# Altium PCB ArduinoRev2.PcbDoc
Units mm, origin at the board's own origin, x right, y up, seen from the top; angles counter-clockwise.
Board outline 57 x 56 mm, 2 copper layers (Top Layer, Bottom Layer); 35 components, 27 nets, 139 pads, 20 vias.
Unrouted connection lines stored in the file: 32.
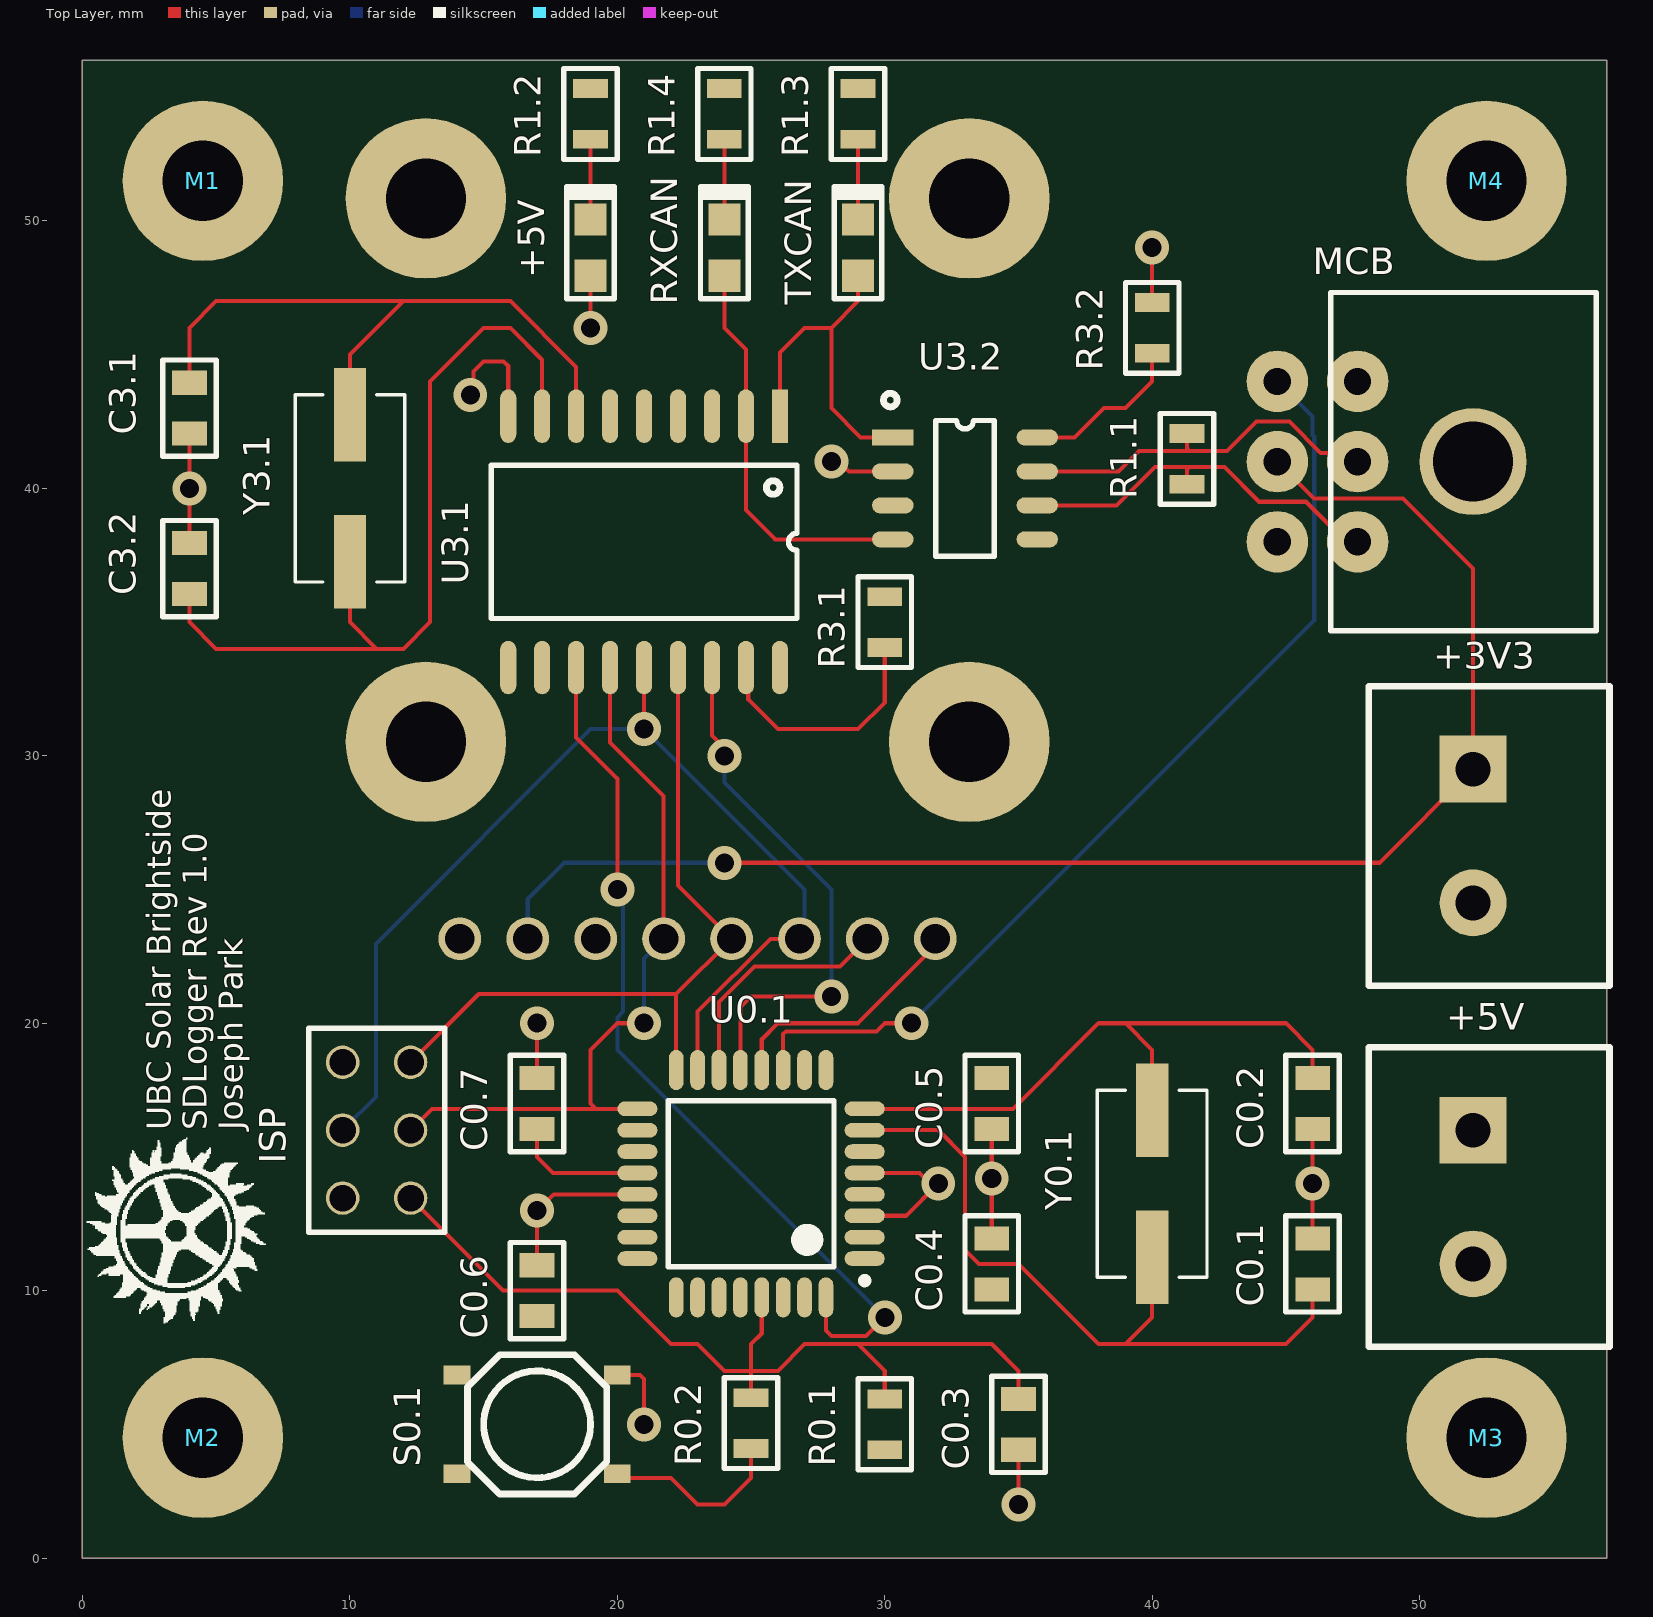
[diagram p0: Top Layer view]
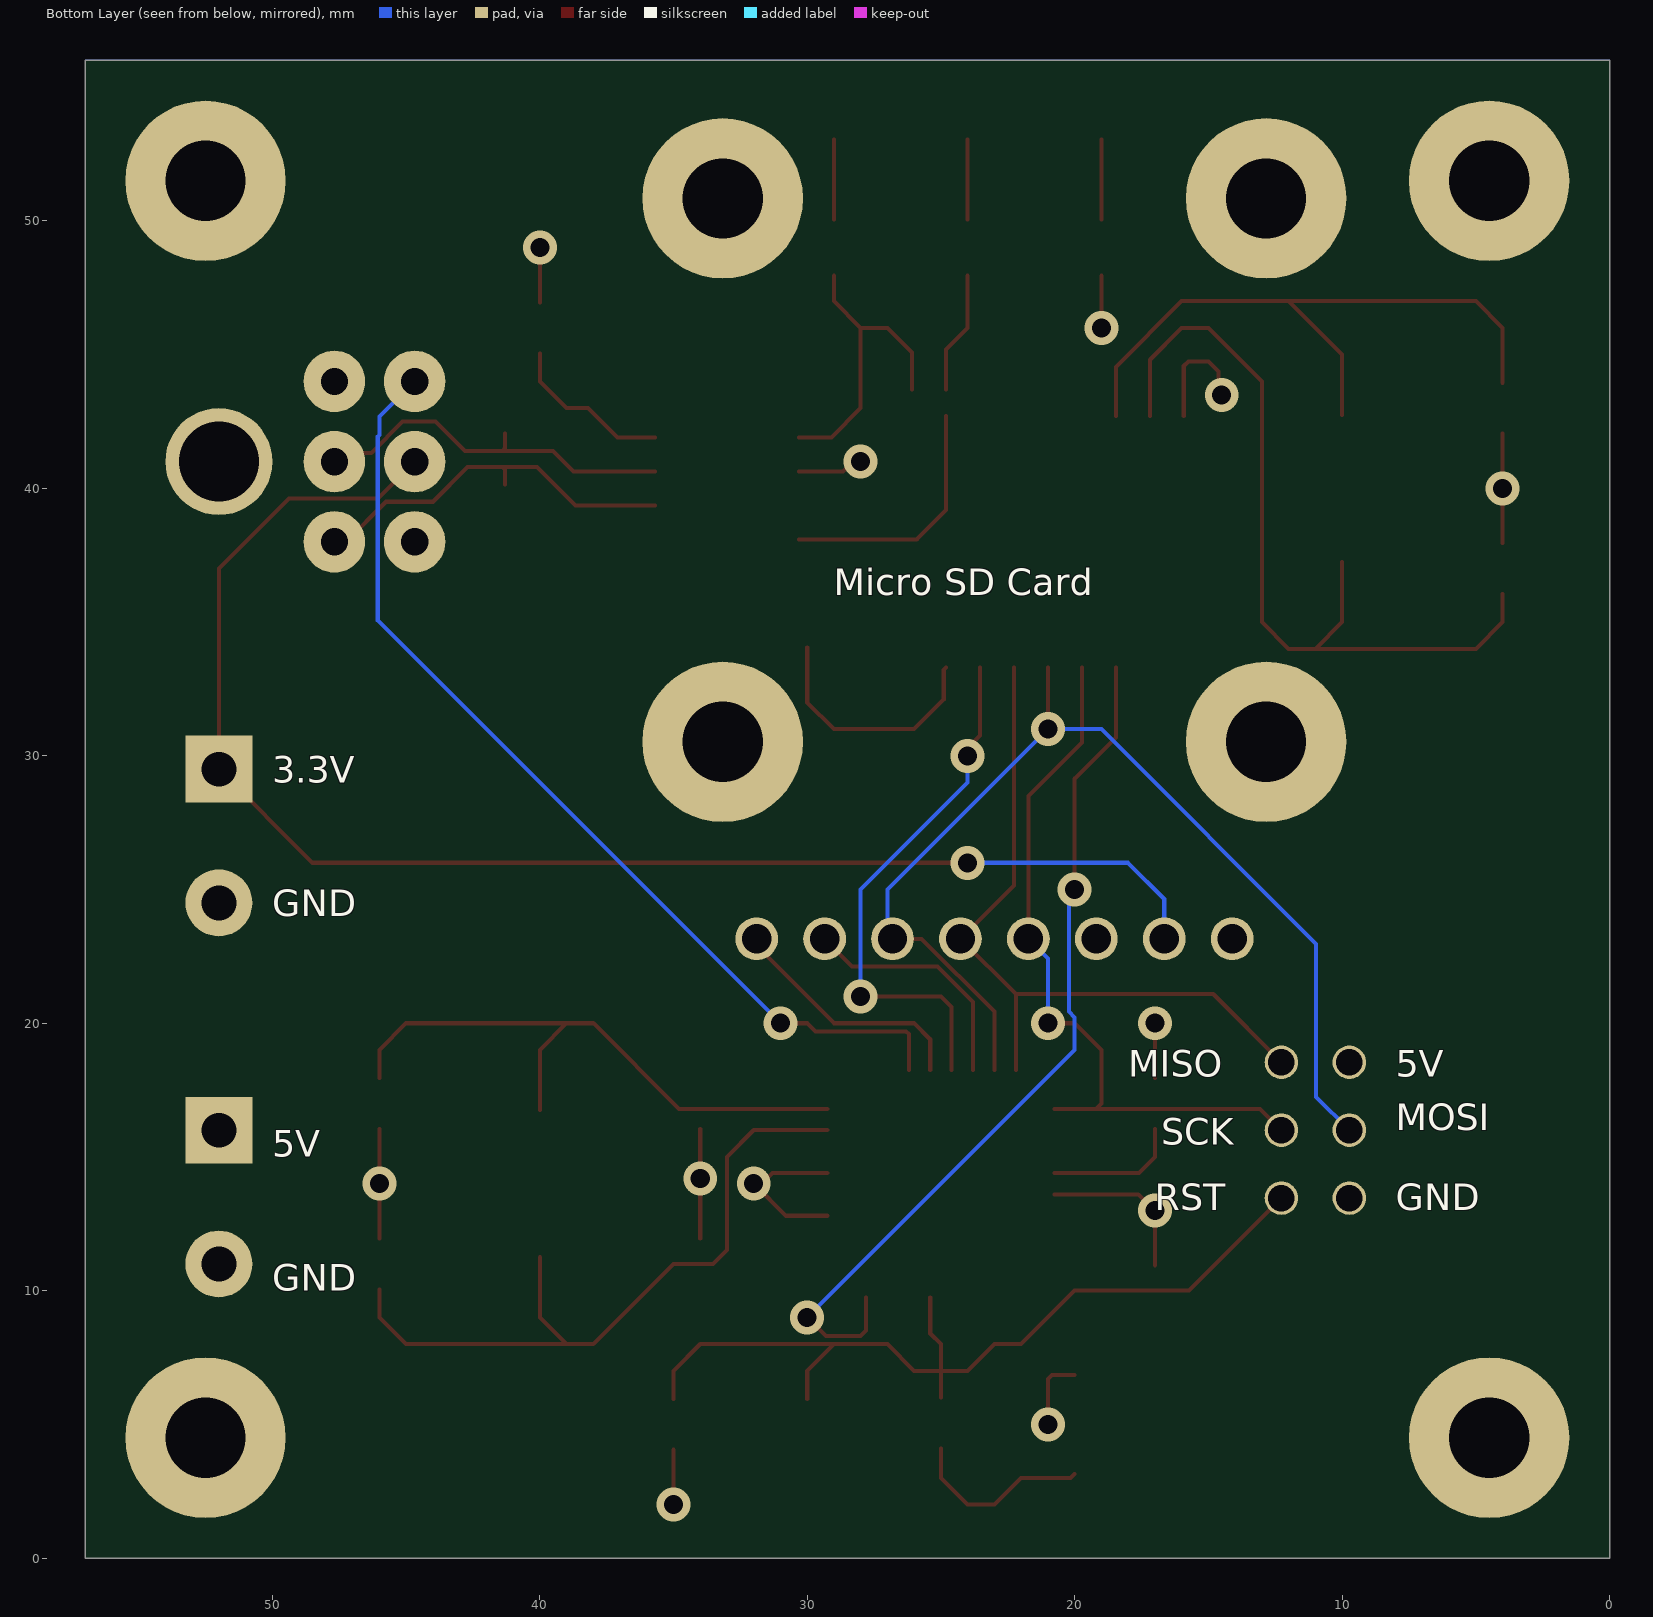
[diagram p1: Bottom Layer view, seen from below]
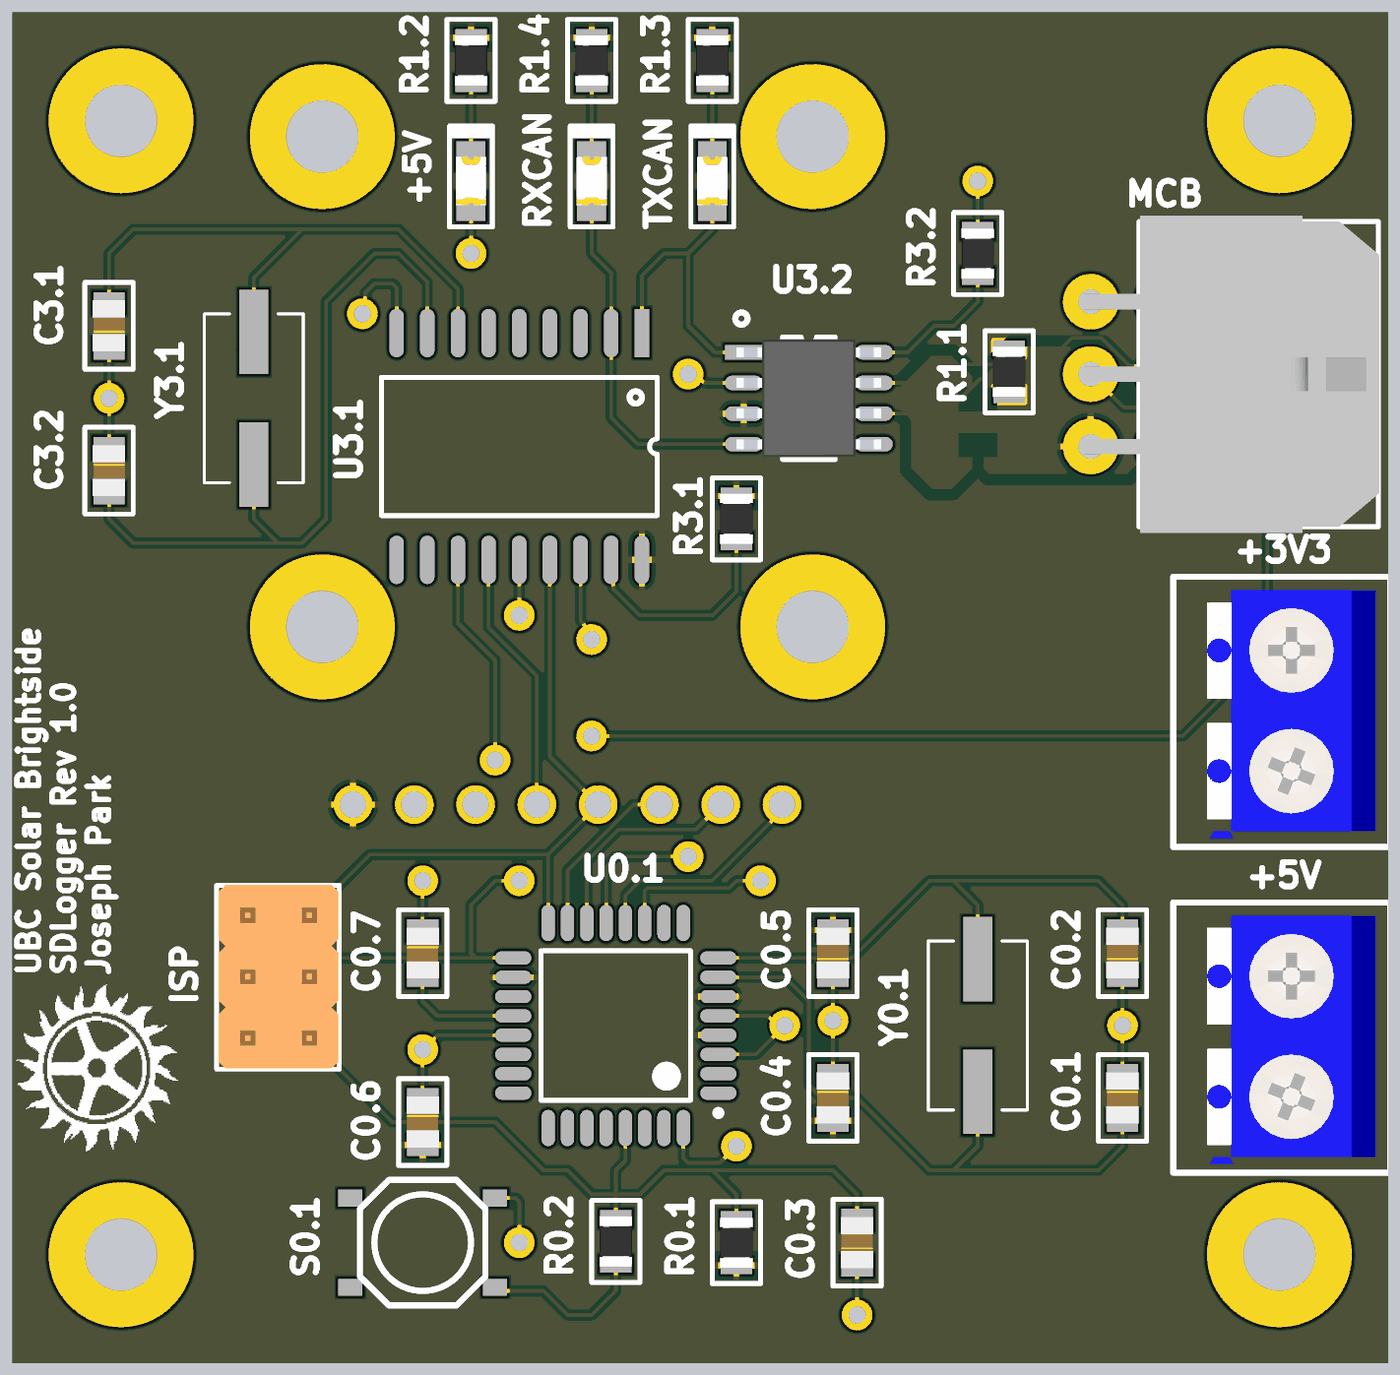
[diagram p2: 3D render of the assembled board from above, using the file's embedded part models]

## Layer stack, top to bottom
Top Solder: solder mask 0.0102, Solder Resist, Dk 3.5
Top Layer: signal copper 0.0356
Dielectric 1: dielectric 0.32, FR-4, Dk 4.8
Bottom Layer: signal copper 0.0356
Bottom Solder: solder mask 0.0102, Solder Resist, Dk 3.5

## Board outline
0,0 57,0 57,56 0,56

## Design rules (kind name [scope] priority, off if disabled: settings)
Clearance [All] p1: gap=0.152 ignorepadtopadclearanceinfootprint=FALSE
HoleSize [All] p1: absolutevalues=TRUE maxlimit=100 minlimit=0.4 maxpercent=80.000 minpercent=20.000
MinimumSolderMaskSliver [All] p1: minsoldermaskwidth=0
PolygonConnect [All] p1: connectstyle=Relief reliefconductorwidth=0.254 reliefentries=4 polygonreliefangle="90 Angle" airgapwidth=0.254
RoutingVias [All] p1: holewidth=0.4 width=0.8 viastyle="Through Hole" minholewidth=0.4 minwidth=0.6 maxholewidth=100 maxwidth=100
SilkToSolderMaskClearance [IsPad] p1: minsilkscreentomaskgap=0 clearancetoexposedcopper=TRUE
SolderMaskExpansion [All] p1: expansion=0.102
Width [All] p1: maxlimit=100 minlimit=0.152 preferedwidth=0.152
27 further rules are at their usual default settings.

## Classes and differential pairs
component class ArduinoRev2: +3V3 +5V C0.1 C0.2 C0.3 C0.4 C0.5 C0.6 C0.7 C3.1 C3.2 ISP M1 M2 M3 M4 MCB "Micro SD Card" R0.1 R0.2 R1.1 R1.2 R1.3 R1.4 R3.1 R3.2 U0.1 U3.1 U3.2 Y0.1 Y3.1

## Components (designator, comment, footprint, x,y, rotation, side; value= is the part's Value field where it differs from the comment)
+3V3 "Scru" "5mm 2POS Screw terminal" 52,27 r270 top (schematic designator J1.2)
+5V "Scru" "5mm 2POS Screw terminal" 52,13.5 r270 top (schematic designator J1.1)
+5V "Red LED" L0805 19,49 r270 top (schematic designator D1.1)
C0.1 "22pF" C0805 46,11 r270 top
C0.2 "22pF" C0805 46,17 r90 top
C0.3 "0.1uF" C0805 35,5 r90 top
C0.4 "0.1uF" C0805 34,11 r270 top
C0.5 "0.1uF" C0805 34,17 r90 top
C0.6 "0.1uF" C0805 17,10 r270 top
C0.7 "0.1uF" C0805 17,17 r270 top
C3.1 "20pF" C0805 4,43 r90 top
C3.2 "20pF" C0805 4,37 r270 top
ISP "HDR" 961206-6404-AR 11,16 r270 top (schematic designator J0.1)
M1 "3mm Mounting Hole" "3mm Mounting Hole"#1 4,53 r0 top
M2 "3mm Mounting Hole" "3mm Mounting Hole"#2 5,5 r0 top
M3 "3mm Mounting Hole" "3mm Mounting Hole"#3 53,4 r0 top
M4 "3mm Mounting Hole" "3mm Mounting Hole"#4 50,53 r0 top
MCB "43045-0600" "Micro-Fit 3.0 6pos" 47.68,41 r90 top (schematic designator J1.3)
"Micro SD Card" "microSD_Card_breakout_board" "Adafruit microSD_breakoutboard" 23,37 r180 bottom (schematic designator U2.1)
R0.1 "4.7K ohm" R0805 30,5 r270 top
R0.2 "330" R0805 25,5.05 r90 top
R1.1 "120 ohm" R0805 41.3,41.1 r90 top
R1.2 "1K" R0805 19,54 r90 top
R1.3 "1K" R0805 29,54 r90 top
R1.4 "1K" R0805 24,54 r90 top
R3.1 "10K" R0805 30,35 r90 top
R3.2 "1K" R0805 40,46 r90 top
RXCAN "Green LED" L0805 24,49 r270 top (schematic designator D1.3)
S0.1 "SPST-NO" "PTS526 SM15 SMTR2 LFS" 17,5 r180 top
TXCAN "Green LED" L0805 29,49 r270 top (schematic designator D1.2)
U0.1 "ATMEGA328P-AU" TQFP80P900X900X120-32N 25,14 r180 top
U3.1 "MCP2515" SOP18 21,38 r270 top
U3.2 "MCP2551" SOP8 33,40 r0 top
Y0.1 "16MHz" ECS-160-20-3X-TR 40,14 r270 top
Y3.1 "16MHz" ECS-160-20-3X-TR 10,40 r90 top

## Footprints (in the part's own frame and the unit in brackets; to place one, negate y for a bottom-side part, rotate by r counter-clockwise, add the part's x,y. Pads: shape width x height; smd on the part's side, far side on the other; paste and mask are expansions set on the pad)
"3mm Mounting Hole"#1 [mm]
  round 6 hole 3: 1(0.5,-1.5)
"3mm Mounting Hole"#2 [mm]
  round 6 hole 3: 1(-0.5,-0.5)
"3mm Mounting Hole"#3 [mm]
  round 6 hole 3: 1(-0.5,0.5)
"3mm Mounting Hole"#4 [mm]
  round 6 hole 3: 1(2.5,-1.5)
"5mm 2POS Screw terminal" [mm]
  rect 2.5x2.5 hole 1.3: 1(-2.5,0)
  round 2.5 hole 1.3: 2(2.5,0)
  silkscreen extent -5.6,-3.9 5.6,5.1, body extent -5.04,-3.1 5.24,4.5, height 10.01
961206-6404-AR [mm] "CONN HEADER VERT 6POS 2.54MM"
  round 1.25 hole 1: 1(-2.54,1.27) 2(0,1.27) 3(2.54,1.27) 4(-2.54,-1.27) 5(0,-1.27) 6(2.54,-1.27)
  silkscreen extent -3.81,-2.54 3.81,2.54, body extent -3.83,-2.47 3.79,2.53, height 7.51
"Adafruit microSD_breakoutboard" [mm]
  round 1.6 hole 1.1 mask+0.102: 1(8.89,-13.843) 2(6.35,-13.843) 3(3.81,-13.843) 4(1.27,-13.843) 5(-1.27,-13.843) 6(-3.81,-13.843) 7(-6.35,-13.843) 8(-8.89,-13.843)
  round 6 hole 3 unplated mask+0.102: ""(-10.16,-6.477) ""(-10.16,13.843) ""(10.16,-6.477) ""(10.16,13.843)
C0805 [mm]
  rect 0.9x1.3 smd: 1(-0.95,0) 2(0.95,0)
  silkscreen extent -1.8,-1 1.8,1, body extent -1.05,-0.67 1.05,0.67, height 0.94
ECS-160-20-3X-TR [mm]
  rect 3.5x1.2 smd: 1(-2.75,0) 2(2.75,0)
  silkscreen extent -3.5,-2.05 3.5,2.05, body extent -0.22,0.29 -0.22,0.29, height 0.25
L0805 [mm]
  rect 1.2x1.2 smd: 1(-1.05,0) 2(1.05,0)
  silkscreen extent -2.29,-0.89 1.91,0.89, body extent -1,-0.62 1,0.63, height 0.82
"Micro-Fit 3.0 6pos" [mm]
  round 2.3 hole 1.02: 1(3,0) 2(0,0) 3(-3,0) 4(3,3) 5(0,3) 6(-3,3)
  round 4 hole 3: ""(0,-4.32)
  silkscreen extent -6.32,-8.92 6.32,1, body extent -6.57,-8.95 6.58,3.29, height 8.78
"PTS526 SM15 SMTR2 LFS" [mm]
  rect 1x0.7 smd: 1(-3,1.85) 2(3,1.85) 3(-3,-1.85) 4(3,-1.85)
  silkscreen extent -2.6,-2.6 2.6,2.6
R0805 [mm]
  rect 0.7x1.3 smd: 1(-0.95,0) 2(0.95,0)
  silkscreen extent -1.7,-1 1.7,1, body extent -1.05,-0.67 1.05,0.68, height 0.6
SOP8 [mm]
  rect 1.55x0.6 smd: 1(-2.7,1.905)
  oval 1.55x0.6 smd: 2(-2.7,0.635) 3(-2.7,-0.635) 4(-2.7,-1.905) 5(2.7,-1.905) 6(2.7,-0.635) 7(2.7,0.635) 8(2.7,1.905)
  silkscreen extent -3.05,-2.54 1.09,3.56, body extent -3,-2.45 3,2.45, height 1.75
SOP18 [mm]
  rect 2x0.6 smd: 1(-4.7,5.08)
  oval 2x0.6 smd: 2(-4.7,3.81) 3(-4.7,2.54) 4(-4.7,1.27) 5(-4.7,0) 6(-4.7,-1.27) 7(-4.7,-2.54) 8(-4.7,-3.81) 9(-4.7,-5.08) 10(4.7,-5.08) 11(4.7,-3.81) 12(4.7,-2.54) 13(4.7,-1.27) 14(4.7,0) 15(4.7,1.27) 16(4.7,2.54) 17(4.7,3.81) 18(4.7,5.08)
  silkscreen extent -2.86,-5.72 2.87,5.72, body extent -3.75,-5.8 3.75,5.8, height 2.65
TQFP80P900X900X120-32N [mm] "TQFP, 32-Leads, Body 7.00x7.00mm, Pitch 0.80mm, IPC Medium Density"
  oval 1.5x0.55 smd: 1(-4.25,2.8) 2(-4.25,2) 3(-4.25,1.2) 4(-4.25,0.4) 5(-4.25,-0.4) 6(-4.25,-1.2) 7(-4.25,-2) 8(-4.25,-2.8) 17(4.25,-2.8) 18(4.25,-2) 19(4.25,-1.2) 20(4.25,-0.4) 21(4.25,0.4) 22(4.25,1.2) 23(4.25,2) 24(4.25,2.8)
  oval 0.55x1.5 smd: 9(-2.8,-4.25) 10(-2,-4.25) 11(-1.2,-4.25) 12(-0.4,-4.25) 13(0.4,-4.25) 14(1.2,-4.25) 15(2,-4.25) 16(2.8,-4.25) 25(2.8,4.25) 26(2,4.25) 27(1.2,4.25) 28(0.4,4.25) 29(-0.4,4.25) 30(-1.2,4.25) 31(-2,4.25) 32(-2.8,4.25)
  silkscreen extent -4.38,-3.1 3.1,3.75, body extent -3.5,-3.5 3.5,3.5, height 1.2

## Part data
+3V3 +5V: library part "5mm 2POS Screw terminal"
+5V: library part SML-LXT0805SRW-TR, "LED RED DIFFUSED 0805 SMD", Case/Package=0805, Case Code (Metric)=2012, Color=Red, Forward Current=20mA, Forward Voltage=1.8V, Lens Color=White, Manufacturer=Lumex, Max Operating Temperature=80°C, Min Operating Temperature=-25°C, Package Quantity=1, Power Rating=80mW, Supplier Part Number 1=67-1555-1-ND, Case Code (Imperial)=0805, Category=Optoelectronics, ComponentLink1Description=https://datasheet.ciiva.com/15967/smllxt0805srwtr-15967412.pdf?src-supplier=Onlinecomponents.com, ComponentLink1URL=https://datasheet.ciiva.com/15967/smllxt0805srwtr-15967412.pdf?src-supplier=Onlinecomponents.com, ComponentLink2Description=https://datasheet.ciiva.com/4688/sml-lxt0805srw-tr-114457-4688733.pdf?src-supplier=Mouser, ComponentLink2URL=https://datasheet.ciiva.com/4688/sml-lxt0805srw-tr-114457-4688733.pdf?src-supplier=Mouser, ComponentLink3Description=https://datasheet.ciiva.com/2110/sml-lxt0805srw-tr-2110039.pdf?src-supplier=Digi-Key, ComponentLink3URL=https://datasheet.ciiva.com/2110/sml-lxt0805srw-tr-2110039.pdf?src-supplier=Digi-Key, ComponentLink4Description=https://datasheet.ciiva.com/2110/sml-lxt0805srw-tr-2110040.pdf?src-supplier=Digi-Key, ComponentLink4URL=https://datasheet.ciiva.com/2110/sml-lxt0805srw-tr-2110040.pdf?src-supplier=Digi-Key, ComponentLink5Description=https://datasheet.ciiva.com/2110/sml-lxt0805srw-tr-2110041.pdf?src-supplier=Digi-Key, ComponentLink5URL=https://datasheet.ciiva.com/2110/sml-lxt0805srw-tr-2110041.pdf?src-supplier=Digi-Key, ComponentLink6Description=https://datasheet.ciiva.com/16376/sml-lxt0805srw-tr-16376845.pdf?src-supplier=Future+Electronics, ComponentLink6URL=https://datasheet.ciiva.com/16376/sml-lxt0805srw-tr-16376845.pdf?src-supplier=Future+Electronics, Height=0.8mm, Illumination Color=Red, Lead Free="Lead Free", Length=2mm, Lens Style=Diffused, Lens Transparency=Diffused, Luminous Intensity=21mcd, Manufacturer Part Number=SML-LXT0805SRW-TR, Mount="Surface Mount", Number of LEDs=1, Number of Pins=2, Packaging="Tape and Reel", Pricing 1="1 = 0.51000, 10 = 0.36600, 25 = 0.28080, 100 = 0.18320, 250 = 0.13432, 500 = 0.11396, 1000 = 0.09361 (USD)", REACH SVHC="No SVHC", RoHS=Yes, Stock 1=60948, Supplier 1=Digi-Key, Test Current=20mA, Viewing Angle=140°, Wavelength=660nm, Width=1.25mm
C0.1 C0.2: library part CC0805JRNPO9BN220, "CAP CER 22PF 50V C0G/NPO 0805"
C0.3 C0.4 C0.5 C0.6 C0.7: library part CL21B104KBCWPNC, "CAP CER 0.1UF 50V X7R 0805", Capacitance=100nF, Case/Package=0805, Case Code (Metric)=2012, Manufacturer=Samsung, Max Operating Temperature=125°C, Min Operating Temperature=-55°C, Ratings=AEC-Q200, Supplier Part Number 1=1276-6557-1-ND, Tolerance=10%, Voltage Rating=50V, Case Code (Imperial)=0805, Category=Capacitors, Features="Soft Termination", Length=0.079inch, Manufacturer Part Number=CL21B104KBCWPNC, Mount="Surface Mount", Packaging="Tape and Reel", Pricing 1="1 = 0.10000, 10 = 0.06700, 100 = 0.02990, 500 = 0.02138, 1000 = 0.01680 (USD)", RoHS=Yes, Stock 1=6545, Supplier 1=Digi-Key, Thickness=0.053inch, Width=0.049inch
C3.1 C3.2: library part C0805C200J5GACTU, "CAP CER 20PF 50V C0G/NP0 0805", Capacitance=10nF, Case/Package=0805, Case Code (Metric)=2012, Dielectric=X7R, Manufacturer=Samsung, Manufacturer Part Number=CL21B103KBANNNC, Max Operating Temperature=125°C, Min Operating Temperature=-55°C, Supplier Part Number 1=399-8033-1-ND, Tolerance=10%, Voltage=50V, Case Code (Imperial)=0805, Category=Capacitors, ComponentLink1Description=https://www.digikey.com/product-detail/en/kemet/C0805C200J5GACTU/399-8033-1-ND/3471756, ComponentLink1URL=https://www.digikey.com/product-detail/en/kemet/C0805C200J5GACTU/399-8033-1-ND/3471756, Contact Plating=Tin, Depth=1.25mm, Height=0.65mm, Lead Free="Lead Free", Length=2mm, Material=Ceramic, Mount="Surface Mount", Packaging="Tape and Reel", Radiation Hardening=No, RoHS=Yes, Supplier 1=Digi-Key, Thickness=0.03inch, Voltage Rating=50V, Voltage Rating (DC)=50V, Width=0.049inch
ISP: library part 961206-6404-AR, "CONN HEADER VERT 6POS 2.54MM", ComponentLink1Description=datasheet, ComponentLink1URL=https://media.digikey.com/pdf/Data%20Sheets/3M%20PDFs/961_2.54mm_StraightSolderTail_DS.pdf, ComponentLink2Description=digikey, ComponentLink2URL=https://www.digikey.com/product-detail/en/3m/961206-6404-AR/3M9466-06-ND/7105229
MCB: "Micro-fit 3.0 6pos right-angle", Case/Package=0612, Color=Black, Contact Resistance=10mR, Current Rating=5A, Flammability Rating="UL94 V-0", Manufacturer=Molex, Manufacturer Part Number=43045-0612, Max Operating Temperature=105°C, Max Voltage Rating (DC)=250.25kV, Min Operating Temperature=-40°C, Package Quantity=1728, Supplier Part Number 1=WM1815-ND, Voltage Rating=250V, Approvals=UL,CSA,TUV, Category="Headers and Wire Housings", ComponentLink1Description=https://datasheet.ciiva.com/30194/128550430450612-pcb-headers-30194512.pdf?src-supplier=Onlinecomponents.com, ComponentLink1URL=https://datasheet.ciiva.com/30194/128550430450612-pcb-headers-30194512.pdf?src-supplier=Onlinecomponents.com, ComponentLink2Description=https://datasheet.ciiva.com/5159/0430450612-pcb-headers-142990-5159553.pdf?src-supplier=Mouser, ComponentLink2URL=https://datasheet.ciiva.com/5159/0430450612-pcb-headers-142990-5159553.pdf?src-supplier=Mouser, ComponentLink3Description=https://datasheet.ciiva.com/11748/0900766b800bd7d2-11748707.pdf?src-supplier=RSComponents, ComponentLink3URL=https://datasheet.ciiva.com/11748/0900766b800bd7d2-11748707.pdf?src-supplier=RSComponents, ComponentLink4Description=https://datasheet.ciiva.com/19462/883464-19462371.pdf?src-supplier=Jameco, ComponentLink4URL=https://datasheet.ciiva.com/19462/883464-19462371.pdf?src-supplier=Jameco, ComponentLink5Description=https://datasheet.ciiva.com/16658/0430450612-pcb-headers-16658411.pdf?src-supplier=Avnet+Europe, ComponentLink5URL=https://datasheet.ciiva.com/16658/0430450612-pcb-headers-16658411.pdf?src-supplier=Avnet+Europe, ComponentLink6Description=https://datasheet.ciiva.com/20209/22-3730e-20209515.pdf?src-supplier=Rapid+Electronics, ComponentLink6URL=https://datasheet.ciiva.com/20209/22-3730e-20209515.pdf?src-supplier=Rapid+Electronics, ComponentLink7Description=https://datasheet.ciiva.com/9468/0430450612-pcb-headers-9468492.pdf?src-supplier=Avnet, ComponentLink7URL=https://datasheet.ciiva.com/9468/0430450612-pcb-headers-9468492.pdf?src-supplier=Avnet, Contact Material=Brass,Tin, Contact Plating=Tin, Depth=8.77mm, Diameter=3mm, Gender=Male, Glow Wire Compliant=Compliant, Halogen Free="Low Halogen", Height=9.91mm, Housing Color=Black, Housing Material=Polymer, Lead Free="Lead Free", Length=13.15mm, Material=Thermoplastic, Max Current Rating=5A, Mount="Through Hole", Number of Circuits=6, Number of Contacts=6, Number of Ports=1, Number of Positions=6, Number of Rows=2, Number of Terminals=6, Orientation=Vertical, Packaging=Tray, Pitch=3mm, Radiation Hardening=No, REACH SVHC=Unknown, RoHS=Yes, Row Spacing=3mm, Stock 1=8230, Supplier 1=Digi-Key, Termination=Solder
R0.1: library part RC0805JR-074K7L, "RES SMD 4.7K OHM 5% 1/8W 0805", ComponentLink1Description=digikey, ComponentLink1URL=https://www.digikey.ca/en/products/detail/yageo/RC0805JR-074K7L/728327
R0.2: library part RC0805JR-074K7L_1, "RES SMD 330 OHM 5% 1/8W 0805", ComponentLink1Description=digikey, ComponentLink1URL=https://www.digikey.ca/en/products/detail/yageo/RC0805JR-07330RL/731258
R1.1: library part ERJ6ENV1200V, "RES SMD 120 OHM 1% 1/8W 0805", Supplier Part Number 1=P120CCT-ND, ComponentLink1Description=https://datasheet.ciiva.com/11821/0900766b80f80784-11821533.pdf?src-supplier=RSComponents, ComponentLink1URL=https://datasheet.ciiva.com/11821/0900766b80f80784-11821533.pdf?src-supplier=RSComponents, Supplier 1=Digi-Key
R1.2 R1.3 R1.4 R3.2: library part ERJ6ENF1001V, "RES SMD 1K OHM 1% 1/8W 0805", Case/Package=0805, Case Code (Metric)=2012, Manufacturer=Panasonic, Max Operating Temperature=155°C, Max Power Dissipation=125mW, Min Operating Temperature=-55°C, Package Quantity=1, Resistance=1kR, Supplier Part Number 1=P1.00KCCT-ND, Temperature Coefficient=100ppm/°C, Tolerance=1%, Voltage Rating=150V, Case Code (Imperial)=0805, Category=Resistors, ComponentLink1Description=https://datasheet.ciiva.com/34303/1988962-34303619.pdf?src-supplier=Jameco, ComponentLink1URL=https://datasheet.ciiva.com/34303/1988962-34303619.pdf?src-supplier=Jameco, ComponentLink2Description=https://datasheet.ciiva.com/11808/0900766b80f80784-11808500.pdf?src-supplier=RSComponents, ComponentLink2URL=https://datasheet.ciiva.com/11808/0900766b80f80784-11808500.pdf?src-supplier=RSComponents, ComponentLink3Description=https://datasheet.ciiva.com/28532/426256-28532134.pdf?src-supplier=Element14, ComponentLink3URL=https://datasheet.ciiva.com/28532/426256-28532134.pdf?src-supplier=Element14, ComponentLink4Description=https://datasheet.ciiva.com/30051/aoa0000ce2-30051974.pdf?src-supplier=Onlinecomponents.com, ComponentLink4URL=https://datasheet.ciiva.com/30051/aoa0000ce2-30051974.pdf?src-supplier=Onlinecomponents.com, ComponentLink5Description=https://datasheet.ciiva.com/16774/70260748-16774249.pdf?src-supplier=Allied+Electronics, ComponentLink5URL=https://datasheet.ciiva.com/16774/70260748-16774249.pdf?src-supplier=Allied+Electronics, ComponentLink6Description=https://datasheet.ciiva.com/46373/1678782-46373337.pdf?src-supplier=Element14, ComponentLink6URL=https://datasheet.ciiva.com/46373/1678782-46373337.pdf?src-supplier=Element14, ComponentLink7Description=https://datasheet.ciiva.com/46373/1678782-46373338.pdf?src-supplier=Element14, ComponentLink7URL=https://datasheet.ciiva.com/46373/1678782-46373338.pdf?src-supplier=Element14, ComponentLink8Description=https://datasheet.ciiva.com/48532/aoa0000ce2-48532156.pdf?src-supplier=Avnet, ComponentLink8URL=https://datasheet.ciiva.com/48532/aoa0000ce2-48532156.pdf?src-supplier=Avnet, ComponentLink9Description=https://datasheet.ciiva.com/7942/426256-7942429.pdf?src-supplier=Element14, ComponentLink9URL=https://datasheet.ciiva.com/7942/426256-7942429.pdf?src-supplier=Element14, ComponentLink10Description=https://datasheet.ciiva.com/16199/aoa0000ce2-16199262.pdf?src-supplier=Future+Electronics, ComponentLink10URL=https://datasheet.ciiva.com/16199/aoa0000ce2-16199262.pdf?src-supplier=Future+Electronics, ComponentLink11Description=https://datasheet.ciiva.com/9117/aoa0000ce2-9117391.pdf?src-supplier=Avnet, ComponentLink11URL=https://datasheet.ciiva.com/9117/aoa0000ce2-9117391.pdf?src-supplier=Avnet, ComponentLink12Description=https://datasheet.ciiva.com/16523/aoa0000ce2-16523855.pdf?src-supplier=Avnet+Asia, ComponentLink12URL=https://datasheet.ciiva.com/16523/aoa0000ce2-16523855.pdf?src-supplier=Avnet+Asia, Composition="Thick Film", Contact Plating=Tin, Depth=1.25mm, Features="Automotive AEC-Q200", Height=0.6mm, Lead Free="Lead Free", Length=2mm, Manufacturer Part Number=ERJ6ENF1001V, Military Standard=Not, Mount="Surface Mount", Number of Pins=2, Number of Terminations=2, Packaging="Tape and Reel", Power Rating=125mW, Pricing 1="1 = 0.100000, 10 = 0.081000, 100 = 0.031100, 1000 = 0.013670, 2500 = 0.011810 (USD)", Radiation Hardening=No, REACH SVHC="No SVHC", RoHS=Yes, Stock 1=946321, Supplier 1=Digi-Key, Termination=SMD/SMT, Voltage Rating (DC)=150V, Width=0.049inch
R3.1: library part ERJ6ENF1002V, "RES SMD 10K OHM 1% 1/8W 0805", Case/Package=0805, Manufacturer=Yageo, Manufacturer Part Number=ERJ-6ENF1002V, Max Operating Temperature=155°C, Min Operating Temperature=-55°C, Power Rating=125mW, Resistance=10000R, Supplier Part Number 1=P10.0KCCT-ND, Temperature Coefficient=100ppm/°C, Tolerance=1%, Voltage Rating (DC)=150V, Category=Resistors, ComponentLink1Description=https://datasheet.ciiva.com/27056/2078477-27056611.pdf?src-supplier=Jameco, ComponentLink1URL=https://datasheet.ciiva.com/27056/2078477-27056611.pdf?src-supplier=Jameco, Depth=1.25mm, Height=0.5mm, Lead Free="Lead Free", Length=2mm, Mount="Surface Mount", Number of Pins=2, Packaging="Tape and Reel", Pricing 1="1 = 0.100000, 10 = 0.081000, 100 = 0.031100, 1000 = 0.013670, 2500 = 0.011810 (USD)", REACH SVHC="No SVHC", RoHS=No, Stock 1=3342401, Supplier 1=Digi-Key, Width=1.25mm
RXCAN TXCAN: library part SML-LXT0805GW-TR, "LED GREEN DIFFUSED SMD", Case/Package=0805, Case Code (Metric)=2012, Color=Green, Forward Current=20mA, Forward Voltage=2V, Lens Color=White, Manufacturer=Lumex, Max Operating Temperature=85°C, Min Operating Temperature=-25°C, Package Quantity=1, Power Rating=50mW, Supplier Part Number 1=67-1553-1-ND, Approvals=UL, Case Code (Imperial)=0805, Category=Optoelectronics, ComponentLink1Description=https://datasheet.ciiva.com/2110/sml-lxt0805gw-tr-2110192.pdf?src-supplier=Digi-Key, ComponentLink1URL=https://datasheet.ciiva.com/2110/sml-lxt0805gw-tr-2110192.pdf?src-supplier=Digi-Key, ComponentLink2Description=https://datasheet.ciiva.com/4689/sml-lxt0805gw-tr-82662-4689266.pdf?src-supplier=Mouser, ComponentLink2URL=https://datasheet.ciiva.com/4689/sml-lxt0805gw-tr-82662-4689266.pdf?src-supplier=Mouser, ComponentLink3Description=https://datasheet.ciiva.com/30063/sml-lxt0805gw-tr-30063898.pdf?src-supplier=Onlinecomponents.com, ComponentLink3URL=https://datasheet.ciiva.com/30063/sml-lxt0805gw-tr-30063898.pdf?src-supplier=Onlinecomponents.com, ComponentLink4Description=https://datasheet.ciiva.com/2110/sml-lxt0805gw-tr-2110193.pdf?src-supplier=Digi-Key, ComponentLink4URL=https://datasheet.ciiva.com/2110/sml-lxt0805gw-tr-2110193.pdf?src-supplier=Digi-Key, ComponentLink5Description=https://datasheet.ciiva.com/2110/sml-lxt0805gw-tr-2110194.pdf?src-supplier=Digi-Key, ComponentLink5URL=https://datasheet.ciiva.com/2110/sml-lxt0805gw-tr-2110194.pdf?src-supplier=Digi-Key, ComponentLink6Description=https://datasheet.ciiva.com/16383/sml-lxt0805gw-tr-16383723.pdf?src-supplier=Future+Electronics, ComponentLink6URL=https://datasheet.ciiva.com/16383/sml-lxt0805gw-tr-16383723.pdf?src-supplier=Future+Electronics, Dominant Wavelength=568nm, Height=0.8mm, Illumination Color=Green, Lead Free="Lead Free", Length=2mm, Lens Style=Rectangular, Lens Transparency=Diffused, Luminous Intensity=11mcd, Manufacturer Part Number=SML-LXT0805GW-TR, Mount="Surface Mount", Number of LEDs=1, Number of Pins=2, Packaging="Tape and Reel", Pricing 1="1 = 0.41000, 10 = 0.29000, 25 = 0.25160, 100 = 0.19360, 250 = 0.15732, 500 = 0.11616, 1000 = 0.09680 (USD)", REACH SVHC="No SVHC", RoHS=Yes, Stock 1=417501, Supplier 1=Digi-Key, Test Current=20mA, Viewing Angle=140°, Wavelength=565nm, Width=1.25mm
S0.1: library part PTS526SM15SMTR2LFS, "TACT 5.2 X 5.2, 1.5 MM H, 160GF, Tactile Switch SPST-NO Top Actuated Surface Mount", Manufacturer="ITT C&K", Supplier Part Number 1=CKN12220-1-ND, Manufacturer Part Number=PTS526SM15SMTR2LFS, RoHS=No, Stock 1=5534, Supplier 1=Digi-Key
U3.1: "Stand-Alone CAN Controller with SPI Interface", ComponentLink1Description=datasheet, ComponentLink1URL=http://ww1.microchip.com/downloads/en/DeviceDoc/MCP2515-Stand-Alone-CAN-Controller-with-SPI-20001801J.pdf
U3.2: "High Speed Can Transceiver", ComponentLink1Description=daatasheet, ComponentLink1URL=http://ww1.microchip.com/downloads/en/DeviceDoc/20001667G.pdf
Y0.1 Y3.1: library part ECS-160-20-3X-TR, "CRYSTAL 16.0000MHZ 20PF SMD", ComponentLink1Description=https://www.digikey.ca/en/products/detail/ecs-inc/ECS-160-20-3X-TR/2676606, ComponentLink1URL=https://www.digikey.ca/en/products/detail/ecs-inc/ECS-160-20-3X-TR/2676606
U0.1: ComponentLink1Description=digikey, ComponentLink1URL=https://www.mouser.ca/ProductDetail/Microchip-Technology-Atmel/ATMEGA328P-AU?qs=K8BHR703ZXiCmmgp6%2FGNmQ%3D%3D, Created by="Joseph Park", Date Created=2/1/2020

## Via types
v1: diameter 1.27, hole 0.711, Top Layer to Bottom Layer, 20 vias

## Nets (pads, with @x,y where several pads share a name; then routed paths per layer and width w, separated by ;. In a path a pad name is that pad's centre, name@x,y a point inside that pad or via, vN(x,y) a via of type N, cw(c..) or ccw(c..) an arc to the next point about the centre after c; other vN are vias at no path point)
+3V3: "Micro SD Card.2" +3V3.1 MCB.5 | length 55.3
  Top Layer w0.152: v1(24,26) 48.5,26 +3V3.1 52,37 49.379,39.621 46.059,39.621 MCB.5
  Bottom Layer w0.152: 16.65,23.157 16.65,24.65 18,26 v1(24,26)
+5V: "Micro SD Card.1" +5V.1@52,16 C0.4.2 C0.5.2 C0.6.2 ISP.4 MCB.6 R0.1.2 R1.2.2 R1.3.2 R1.4.2 R3.1.2 U0.1.4 U0.1.6 U0.1.18 U3.1.18 U3.2.3
AREF: C0.7.2 U0.1.20 | length 5
  Top Layer w0.152: C0.7.2 17,15 17.6,14.4 U0.1.20
CANH: MCB.2 R1.1.2 U3.2.7 | length 14.1
  Top Layer w0.152: U3.2.7 38.735,40.635 39.5,41.4 41.4,41.4 ; R1.1.2 41.3,41.5 41.4,41.4 ; MCB.2 47.352,41.328 46.301,41.328 45.13,42.5 43.9,42.5 42.8,41.4 41.4,41.4
CANL: MCB.3 R1.1.1 U3.2.6 | length 14.4
  Top Layer w0.152: U3.2.6 38.665,39.365 40.1,40.8 41.4,40.8 ; R1.1.1 41.3,40.7 41.4,40.8 ; MCB.3 47.249,38 45.749,39.5 44,39.5 42.7,40.8 41.4,40.8
GND: "Micro SD Card.3" +3V3.2 +5V.2 C0.1.1 C0.2.1 C0.3.1 C0.4.1 C0.5.1 C0.6.1 C0.7.1 C3.1.1 C3.2.1 ISP.6 MCB.1 R3.2.2 S0.1.3 U0.1.3 U0.1.5 U0.1.21 U3.1.9 U3.2.2 | length 42.2
  Top Layer w0.152: C3.2.1 v1(4,40) C3.1.1 ; v1(14.5,43.5) 14.614,43.614 14.614,44.364 15,44.75 15.75,44.75 15.92,44.58 U3.1.9 ; C0.6.1 v1(17,13) 17.021,13 17.621,13.6 U0.1.21 ; C0.7.1 v1(17,20) ; v1(19,46) +5V.2@19,47.95 ; S0.1.3 20.85,6.85 21,6.7 v1(21,5) ; v1(28,41) 28.302,41 28.667,40.635 U3.2.2 ; U0.1.3 30.8,12.8 v1(32,14) 31.698,14 31.298,14.4 U0.1.5 ; C0.4.1 v1(34,14.2) C0.5.1 ; v1(35,2) C0.3.1 ; R3.2.2 v1(40,49) ; C0.1.1 v1(46,14) C0.2.1
INT: U0.1.32 U3.1.12 | length 33.1
  Top Layer w0.152: U3.1.12 18.46,30.681 20,29.141 v1(20,25) ; U0.1.32 27.8,8.505 28,8.305 29.305,8.305 v1(30,9)
  Bottom Layer w0.152: v1(20,25) 20.219,24.781 20.219,20.44 20,20.221 20,19 v1(30,9)
MISO: "Micro SD Card.5" ISP.1 U0.1.16 U3.1.15 | length 27.7
  Top Layer w0.152: ISP.1 14.817,21.087 22.2,21.087 ; U0.1.16 22.2,21.087 ; U3.1.15 22.27,25.157 24.27,23.157 22.2,21.087
MOSI: "Micro SD Card.6" ISP.5 U0.1.15 U3.1.14 | length 40.7
  Top Layer w0.152: v1(21,31) U3.1.14 ; U0.1.15 23,20.431 25.726,23.157 26.81,23.157
  Bottom Layer w0.152: ISP.5 10.97,17.24 10.97,22.97 19,31 v1(21,31) 27,25 27,23.347 26.81,23.157
NetC0.1_2: C0.1.2 U0.1.7 Y0.1.2 | length 27.2
  Top Layer w0.152: U0.1.7 32,16 33,15 33,11.527 33.527,11 35,11 38,8 39,8 ; Y0.1.2 40,9 39,8 ; C0.1.2 46,9 45,8 39,8
NetC0.2_2: C0.2.2 U0.1.8 Y0.1.1 | length 23.2
  Top Layer w0.152: U0.1.8 34.8,16.8 38,20 39,20 ; Y0.1.1 40,19 39,20 ; C0.2.2 46,19 45,20 39,20
NetC3.1_2: C3.1.2 U3.1.7 Y3.1.2 | length 24.9
  Top Layer w0.152: C3.1.2 4,46 5,47 12,47 ; Y3.1.2 10,45 12,47 ; U3.1.7 18.46,44.54 16,47 12,47
NetC3.2_2: C3.2.2 U3.1.8 Y3.1.1 | length 31.2
  Top Layer w0.152: C3.2.2 4,35 5,34 11,34 ; Y3.1.1 10,35 11,34 ; U3.1.8 17.19,44.81 16,46 15,46 13,44 13,35 12,34 11,34
NetD1.1_1: +5V.1@19,50.05 R1.2.1 | length 3
  Top Layer w0.152: +5V.1@19,50.05 R1.2.1
NetD1.2_1: R1.3.1 TXCAN.1 | length 3
  Top Layer w0.152: TXCAN.1 R1.3.1
NetD1.3_1: R1.4.1 RXCAN.1 | length 3
  Top Layer w0.152: RXCAN.1 R1.4.1
NetR0.2_1: R0.2.1 S0.1.1 | length 7
  Top Layer w0.152: S0.1.1 20.15,3 22,3 23,2 24,2 25,3 R0.2.1
NetR3.1_1: R3.1.1 U3.1.17 | length 9.3
  Top Layer w0.152: U3.1.17 24.896,33.214 24.896,32.104 26,31 29,31 30,32 R3.1.1
NetR3.2_1: R3.2.1 U3.2.8 | length 6.2
  Top Layer w0.152: U3.2.8 37.101,41.905 38.196,43 39,43 40,44 R3.2.1
RESET: C0.3.2 ISP.3 R0.1.1 R0.2.2 U0.1.29 | length 33.7
  Top Layer w0.152: ISP.3 15.73,10 20,10 22,8 23,8 24,7 25,7 ; R0.2.2 25,7 ; U0.1.29 25.4,8.4 25,8 25,7 ; R0.1.1 30,7 29,8 ; C0.3.2 35,7 34,8 29,8 ; 25,7 26,7 27,8 29,8
RX_CAN: RXCAN.2 U3.1.2 U3.2.4 | length 14
  Top Layer w0.152: RXCAN.2 24,46 24.81,45.19 24.81,43.7 ; U3.1.2 24.81,39.19 25.905,38.095 U3.2.4
SCK: "Micro SD Card.4" ISP.2 U0.1.17 U3.1.13 | length 27.9
  Top Layer w0.152: ISP.2 13.07,16.8 19.2,16.8 ; U3.1.13 19.73,30.491 21.73,28.491 21.73,23.157 ; U0.1.17 19.2,16.8 ; v1(21,20) 20,20 19,19 19,17 19.2,16.8
  Bottom Layer w0.152: v1(21,20) 21,22.427 21.73,23.157
SD_CD: "Micro SD Card.8" U0.1.12 | length 9.4
  Top Layer w0.152: U0.1.12 25.4,19.4 26,20 29,20 31.733,22.733 31.733,23 31.89,23.157
SD_CS: "Micro SD Card.7" U0.1.14 | length 9.1
  Top Layer w0.152: U0.1.14 23.8,20.8 25.128,22.128 28.321,22.128 29.35,23.157
SD_EN: MCB.4 U0.1.11 | length 37.1
  Top Layer w0.152: U0.1.11 26.2,19.59 26.305,19.695 29.695,19.695 30,20 v1(31,20)
  Bottom Layer w0.152: v1(31,20) 46.059,35.059 46.059,41.941 46,42 46,42.68 MCB.4
SPI_CS: U0.1.13 U3.1.16 | length 20.1
  Top Layer w0.152: U3.1.16 23.54,30.761 24,30.301 v1(24,30) ; U0.1.13 24.6,20.6 25,21 v1(28,21)
  Bottom Layer w0.152: v1(24,30) 24,29 28,25 v1(28,21)
TX_CAN: TXCAN.2 U3.1.1 U3.2.1 | length 11.8
  Top Layer w0.152: 26.08,43.7 26.08,45.08 27,46 28,46 ; TXCAN.2 29,47 28,46 ; U3.2.1 29.095,41.905 28,43 28,44 28,46
pads on no net: "Micro SD Card." M1.1 M2.1 M3.1 M4.1 MCB. S0.1.2 S0.1.4 U0.1.1 U0.1.2 U0.1.9 U0.1.10 U0.1.19 U0.1.22 U0.1.23 U0.1.24 U0.1.25 U0.1.26 U0.1.27 U0.1.28 U0.1.30 U0.1.31 U3.1.3 U3.1.4 U3.1.5 U3.1.6 U3.1.10 U3.1.11 U3.2.5

## Polygon pours and split planes (outlines as drawn)
GND on Bottom Layer "GND" (solid, shelved, pour order 4): 0,56 57,56 57,0 0,0
+5V on Top Layer "PWR" (solid, shelved, pour order 6): 0,56 57,56 57,0 0,0

## Other copper
Top Layer:
  pour cut-out: 14,37
Bottom Layer:
  pour cut-out: 12,33 3,33 3,39 2,39 2,32 13,32 13,48 2,48 2,40 3,40 3,47 12,47
  pour cut-out: 43,21 47,21 47,7 37,7 37,21 42,21 42,22 36,22 36,6 48,6 48,22 43,22

## Silkscreen, mask and mechanical layers (free items; w line width, h text height)
Top Overlay:
  drawing of 2 lines, arcs and shapes, not listed
  text "UBC Solar Brightside / SDLogger Rev 1.0 / Joseph Park" at 6,16 h0.9 r90
Bottom Overlay:
  text "3.3V" at 50,29 h1
  text "GND" at 50,24 h1
  text "5V" at 8,18 h1
  text "MISO" at 18,18 h1
  text "MOSI" at 8,16 h1
  text "SCK" at 16.767,15.448 h1
  text "5V" at 50,15 h1
  text "GND" at 8,13 h1
  text "RST" at 17,13 h1
  text "GND" at 50,10 h1

## Text inside footprints (layer, text, board x,y; h text height)
"Micro SD Card": Dimensions "(FLIPPED)" at 33.668,38.905 h1